# Altium PCB PULSECAPS.PcbDoc
Units mm, origin at the board's own origin, x right, y up, seen from the top; angles counter-clockwise.
Board outline 255 x 158 mm, 2 copper layers (Top Layer, Bottom Layer), stack 1.571 mm thick; 90 components, 32 nets, 198 pads, 0 vias.
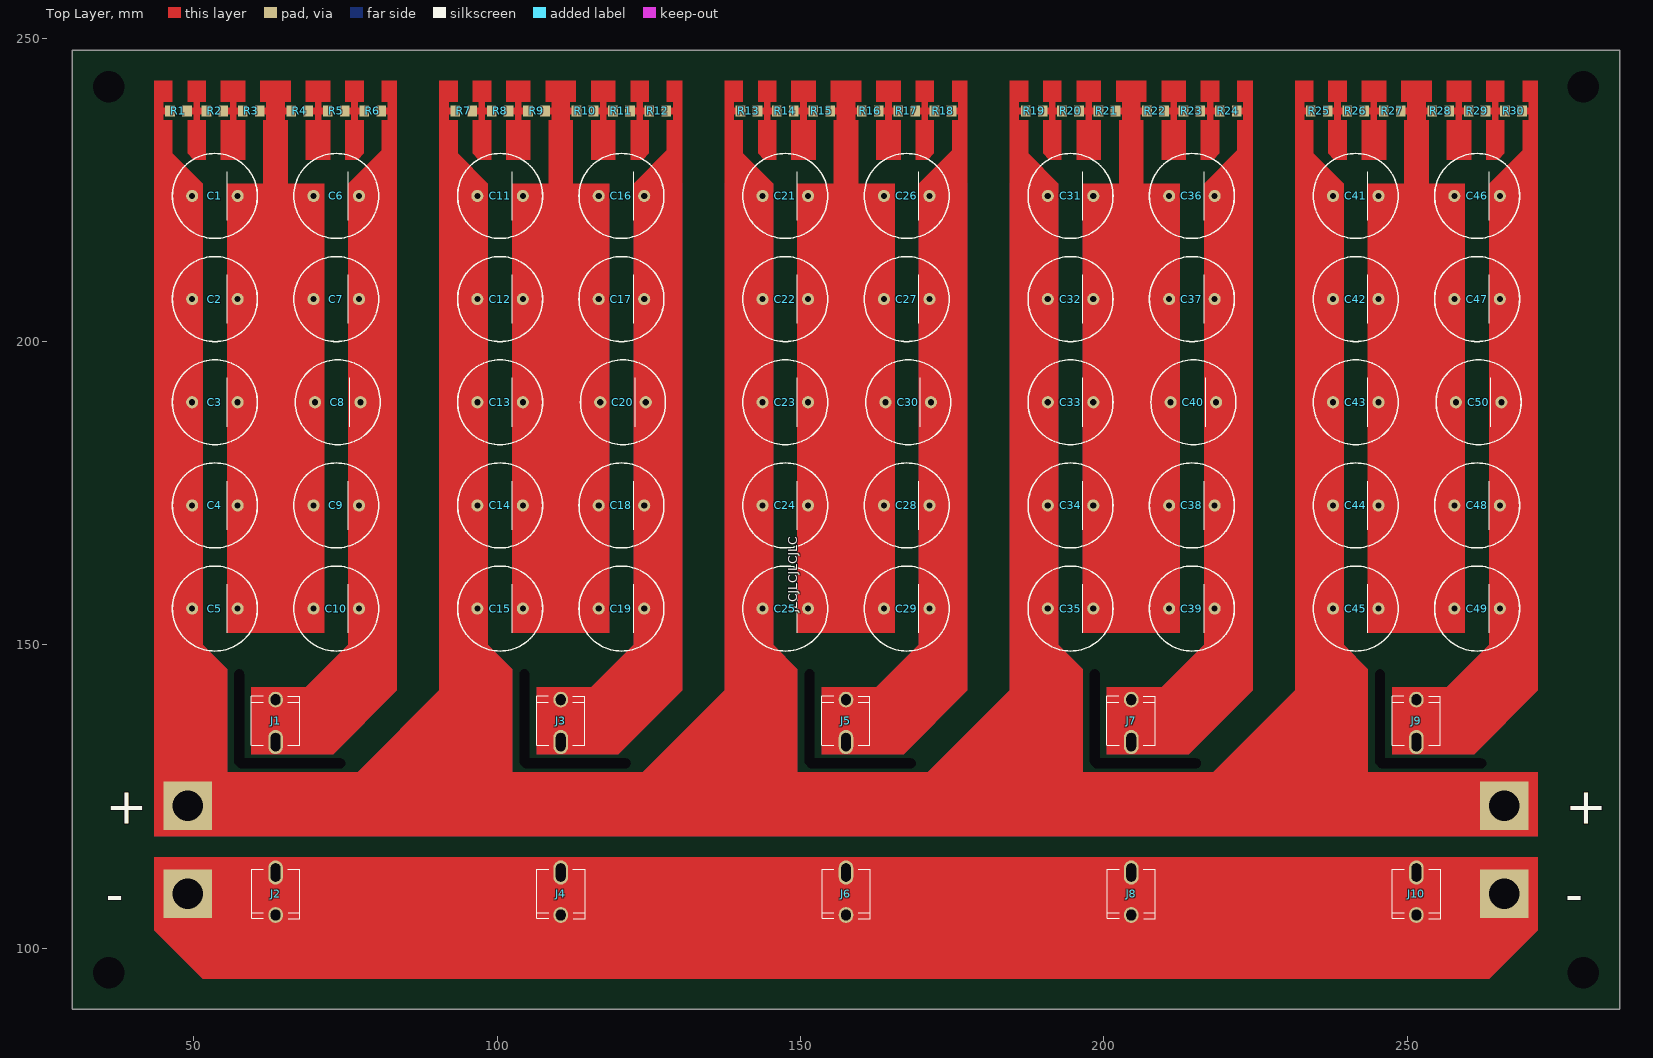
[diagram p0: Top Layer view]
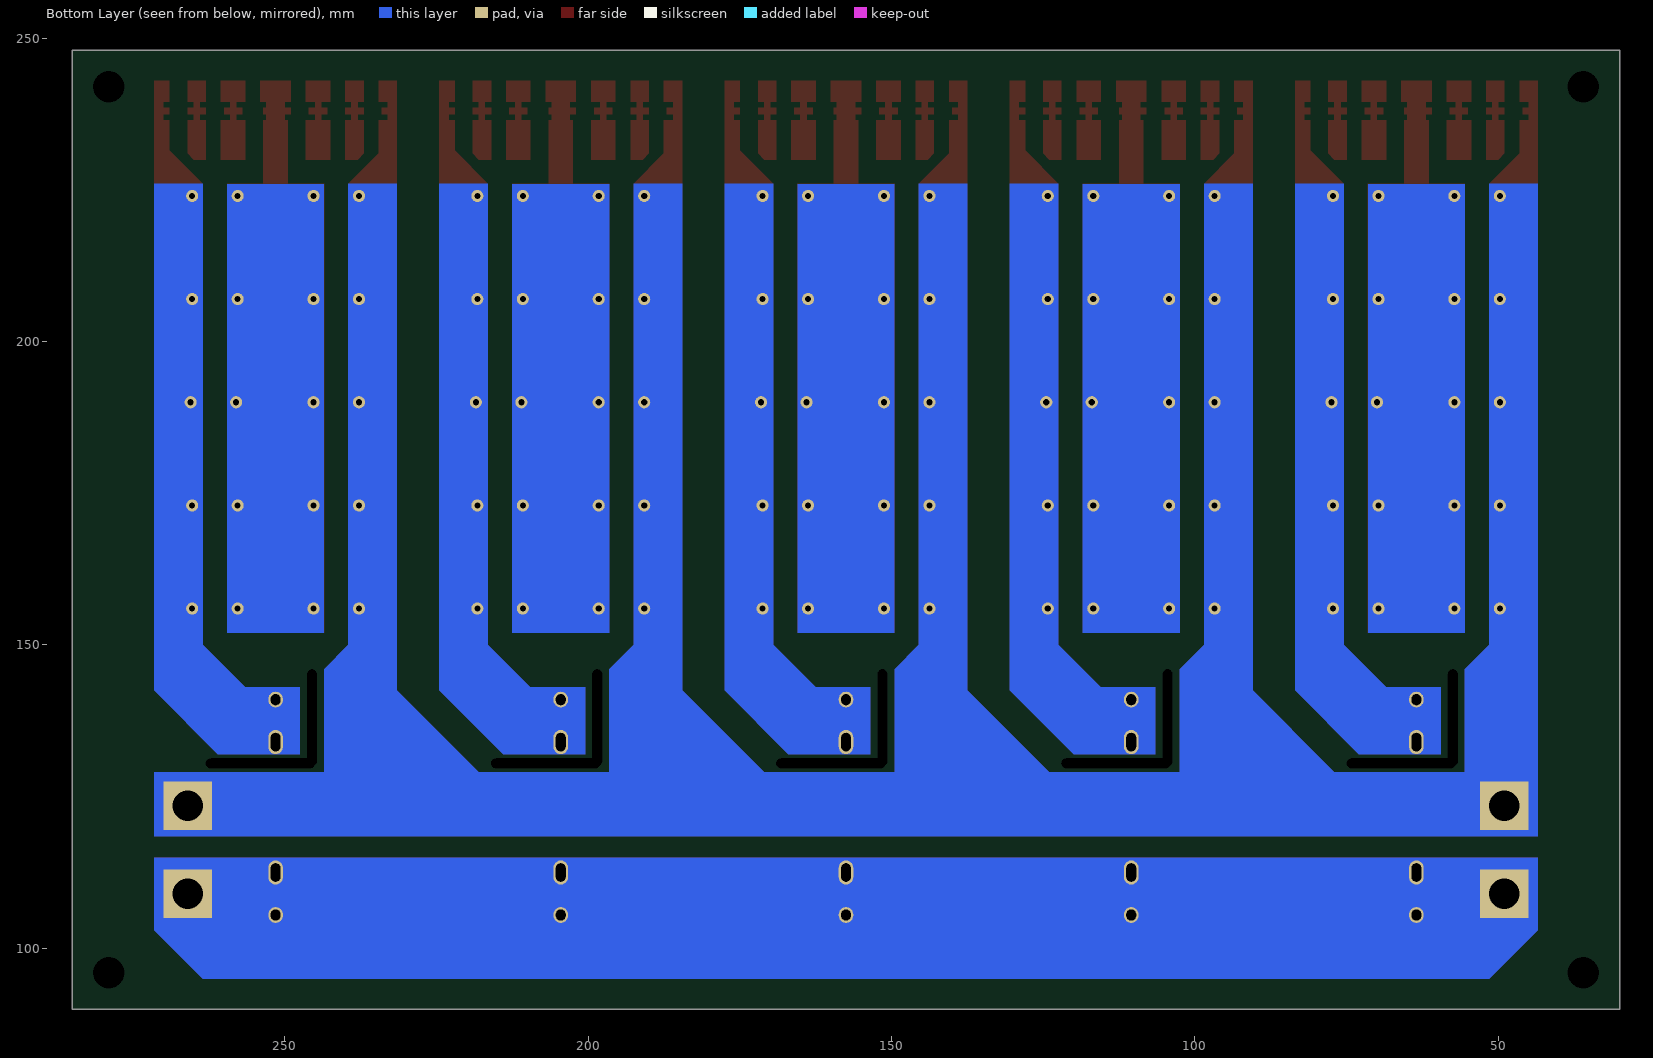
[diagram p1: Bottom Layer view, seen from below]

## Layer stack, top to bottom
Top Solder: solder mask 0.0102, Solder Resist, Dk 3.5
Top Layer: signal copper 0.0356
Dielectric 1: dielectric 1.5, FR-4, Dk 4.8
Bottom Layer: signal copper 0.0356
Bottom Solder: solder mask 0.0102, Solder Resist, Dk 3.5

## Board outline
30,90 285,90 285,248 30,248

## Design rules (kind name [scope] priority, off if disabled: settings)
Clearance [All] p1: gap=0.254 ignorepadtopadclearanceinfootprint=FALSE except(0: Arc-Hole Track-Hole SMDPad-Hole THPad-Hole Via-Hole Fill-Hole Poly-Hole Region-Hole Text-Hole)
PolygonConnect [All] p1: connectstyle=Relief reliefconductorwidth=0.254 reliefentries=4 polygonreliefangle="90 Angle" airgapwidth=0.254
RoutingVias [All] p1: holewidth=0.711 width=1.27 viastyle="Through Hole" minholewidth=0.711 minwidth=1.27 maxholewidth=0.711 maxwidth=1.27
SolderMaskExpansion [All] p1: expansion=0.102
Width [All] p1: maxlimit=0.254 minlimit=0.254 preferedwidth=0.254
30 further rules are at their usual default settings.

## Components (designator, comment, footprint, x,y, rotation, side; value= is the part's Value field where it differs from the comment)
C1 "400BXW100MEFR16X30" C_CAN_TH_7.5MM_LEADS 53.5,224 r180 top value=100uF
C2 "400BXW100MEFR16X30" C_CAN_TH_7.5MM_LEADS 53.5,207 r180 top value=100uF
C3 "400BXW100MEFR16X30" C_CAN_TH_7.5MM_LEADS 53.5,190 r180 top value=100uF
C4 "400BXW100MEFR16X30" C_CAN_TH_7.5MM_LEADS 53.5,173 r180 top value=100uF
C5 "400BXW100MEFR16X30" C_CAN_TH_7.5MM_LEADS 53.5,156 r180 top value=100uF
C6 "400BXW100MEFR16X30" C_CAN_TH_7.5MM_LEADS 73.5,224 r180 top value=100uF
C7 "400BXW100MEFR16X30" C_CAN_TH_7.5MM_LEADS 73.5,207 r180 top value=100uF
C8 "400BXW100MEFR16X30" C_CAN_TH_7.5MM_LEADS 73.75,190 r180 top value=100uF
C9 "400BXW100MEFR16X30" C_CAN_TH_7.5MM_LEADS 73.5,173 r180 top value=100uF
C10 "400BXW100MEFR16X30" C_CAN_TH_7.5MM_LEADS 73.5,156 r180 top value=100uF
C11 "400BXW100MEFR16X30" C_CAN_TH_7.5MM_LEADS 100.5,224 r180 top value=100uF
C12 "400BXW100MEFR16X30" C_CAN_TH_7.5MM_LEADS 100.5,207 r180 top value=100uF
C13 "400BXW100MEFR16X30" C_CAN_TH_7.5MM_LEADS 100.5,190 r180 top value=100uF
C14 "400BXW100MEFR16X30" C_CAN_TH_7.5MM_LEADS 100.5,173 r180 top value=100uF
C15 "400BXW100MEFR16X30" C_CAN_TH_7.5MM_LEADS 100.5,156 r180 top value=100uF
C16 "400BXW100MEFR16X30" C_CAN_TH_7.5MM_LEADS 120.5,224 r180 top value=100uF
C17 "400BXW100MEFR16X30" C_CAN_TH_7.5MM_LEADS 120.5,207 r180 top value=100uF
C18 "400BXW100MEFR16X30" C_CAN_TH_7.5MM_LEADS 120.5,173 r180 top value=100uF
C19 "400BXW100MEFR16X30" C_CAN_TH_7.5MM_LEADS 120.5,156 r180 top value=100uF
C20 "400BXW100MEFR16X30" C_CAN_TH_7.5MM_LEADS 120.75,190 r180 top value=100uF
C21 "400BXW100MEFR16X30" C_CAN_TH_7.5MM_LEADS 147.5,224 r180 top value=100uF
C22 "400BXW100MEFR16X30" C_CAN_TH_7.5MM_LEADS 147.5,207 r180 top value=100uF
C23 "400BXW100MEFR16X30" C_CAN_TH_7.5MM_LEADS 147.5,190 r180 top value=100uF
C24 "400BXW100MEFR16X30" C_CAN_TH_7.5MM_LEADS 147.5,173 r180 top value=100uF
C25 "400BXW100MEFR16X30" C_CAN_TH_7.5MM_LEADS 147.5,156 r180 top value=100uF
C26 "400BXW100MEFR16X30" C_CAN_TH_7.5MM_LEADS 167.5,224 r180 top value=100uF
C27 "400BXW100MEFR16X30" C_CAN_TH_7.5MM_LEADS 167.5,207 r180 top value=100uF
C28 "400BXW100MEFR16X30" C_CAN_TH_7.5MM_LEADS 167.5,173 r180 top value=100uF
C29 "400BXW100MEFR16X30" C_CAN_TH_7.5MM_LEADS 167.5,156 r180 top value=100uF
C30 "400BXW100MEFR16X30" C_CAN_TH_7.5MM_LEADS 167.75,190 r180 top value=100uF
C31 "400BXW100MEFR16X30" C_CAN_TH_7.5MM_LEADS 194.5,224 r180 top value=100uF
C32 "400BXW100MEFR16X30" C_CAN_TH_7.5MM_LEADS 194.5,207 r180 top value=100uF
C33 "400BXW100MEFR16X30" C_CAN_TH_7.5MM_LEADS 194.5,190 r180 top value=100uF
C34 "400BXW100MEFR16X30" C_CAN_TH_7.5MM_LEADS 194.5,173 r180 top value=100uF
C35 "400BXW100MEFR16X30" C_CAN_TH_7.5MM_LEADS 194.5,156 r180 top value=100uF
C36 "400BXW100MEFR16X30" C_CAN_TH_7.5MM_LEADS 214.5,224 r180 top value=100uF
C37 "400BXW100MEFR16X30" C_CAN_TH_7.5MM_LEADS 214.5,207 r180 top value=100uF
C38 "400BXW100MEFR16X30" C_CAN_TH_7.5MM_LEADS 214.5,173 r180 top value=100uF
C39 "400BXW100MEFR16X30" C_CAN_TH_7.5MM_LEADS 214.5,156 r180 top value=100uF
C40 "400BXW100MEFR16X30" C_CAN_TH_7.5MM_LEADS 214.75,190 r180 top value=100uF
C41 "400BXW100MEFR16X30" C_CAN_TH_7.5MM_LEADS 241.5,224 r180 top value=100uF
C42 "400BXW100MEFR16X30" C_CAN_TH_7.5MM_LEADS 241.5,207 r180 top value=100uF
C43 "400BXW100MEFR16X30" C_CAN_TH_7.5MM_LEADS 241.5,190 r180 top value=100uF
C44 "400BXW100MEFR16X30" C_CAN_TH_7.5MM_LEADS 241.5,173 r180 top value=100uF
C45 "400BXW100MEFR16X30" C_CAN_TH_7.5MM_LEADS 241.5,156 r180 top value=100uF
C46 "400BXW100MEFR16X30" C_CAN_TH_7.5MM_LEADS 261.5,224 r180 top value=100uF
C47 "400BXW100MEFR16X30" C_CAN_TH_7.5MM_LEADS 261.5,207 r180 top value=100uF
C48 "400BXW100MEFR16X30" C_CAN_TH_7.5MM_LEADS 261.5,173 r180 top value=100uF
C49 "400BXW100MEFR16X30" C_CAN_TH_7.5MM_LEADS 261.5,156 r180 top value=100uF
C50 "400BXW100MEFR16X30" C_CAN_TH_7.5MM_LEADS 261.75,190 r180 top value=100uF
J1 "LS-601" LS-601 63.5,137.5 r270 top
J2 "LS-601" LS-601 63.5,109 r90 top
J3 "LS-601" LS-601 110.5,137.5 r270 top
J4 "LS-601" LS-601 110.5,109 r90 top
J5 "LS-601" LS-601 157.5,137.5 r270 top
J6 "LS-601" LS-601 157.5,109 r90 top
J7 "LS-601" LS-601 204.5,137.5 r270 top
J8 "LS-601" LS-601 204.5,109 r90 top
J9 "LS-601" LS-601 251.5,137.5 r270 top
J10 "LS-601" LS-601 251.5,109 r90 top
R1 "1206W4F1003T5E" R_1206 47.5,238 r180 top value=100k
R2 "1206W4F1003T5E" R_1206 53.5,238 r180 top value=100k
R3 "1206W4F1003T5E" R_1206 59.5,238 r180 top value=100k
R4 "1206W4F1003T5E" R_1206 67.5,238 r180 top value=100k
R5 "1206W4F1003T5E" R_1206 73.5,238 r180 top value=100k
R6 "1206W4F1003T5E" R_1206 79.5,238 r180 top value=100k
R7 "1206W4F1003T5E" R_1206 94.5,238 r180 top value=100k
R8 "1206W4F1003T5E" R_1206 100.5,238 r180 top value=100k
R9 "1206W4F1003T5E" R_1206 106.5,238 r180 top value=100k
R10 "1206W4F1003T5E" R_1206 114.5,238 r180 top value=100k
R11 "1206W4F1003T5E" R_1206 120.5,238 r180 top value=100k
R12 "1206W4F1003T5E" R_1206 126.5,238 r180 top value=100k
R13 "1206W4F1003T5E" R_1206 141.5,238 r180 top value=100k
R14 "1206W4F1003T5E" R_1206 147.5,238 r180 top value=100k
R15 "1206W4F1003T5E" R_1206 153.5,238 r180 top value=100k
R16 "1206W4F1003T5E" R_1206 161.5,238 r180 top value=100k
R17 "1206W4F1003T5E" R_1206 167.5,238 r180 top value=100k
R18 "1206W4F1003T5E" R_1206 173.5,238 r180 top value=100k
R19 "1206W4F1003T5E" R_1206 188.5,238 r180 top value=100k
R20 "1206W4F1003T5E" R_1206 194.5,238 r180 top value=100k
R21 "1206W4F1003T5E" R_1206 200.5,238 r180 top value=100k
R22 "1206W4F1003T5E" R_1206 208.5,238 r180 top value=100k
R23 "1206W4F1003T5E" R_1206 214.5,238 r180 top value=100k
R24 "1206W4F1003T5E" R_1206 220.5,238 r180 top value=100k
R25 "1206W4F1003T5E" R_1206 235.5,238 r180 top value=100k
R26 "1206W4F1003T5E" R_1206 241.5,238 r180 top value=100k
R27 "1206W4F1003T5E" R_1206 247.5,238 r180 top value=100k
R28 "1206W4F1003T5E" R_1206 255.5,238 r180 top value=100k
R29 "1206W4F1003T5E" R_1206 261.5,238 r180 top value=100k
R30 "1206W4F1003T5E" R_1206 267.5,238 r180 top value=100k

## Footprints (in the part's own frame and the unit in brackets; to place one, negate y for a bottom-side part, rotate by r counter-clockwise, add the part's x,y. Pads: shape width x height; smd on the part's side, far side on the other; paste and mask are expansions set on the pad)
C_CAN_TH_7.5MM_LEADS [mm]
  round 2 hole 1: 1(-3.75,0) 2(3.75,0)
  silkscreen extent -7,-7 7,7, body extent -8,-8 8,8, height 25.02
LS-601 [mm] "FUSE HOLDER"
  oval 2.6x2.4 hole 1.6 slot 1.8 at 0 deg: 1(-3.5,0)
  oval 4x2.4 hole 1.6 slot 3 at 0 deg: 1(3.5,0)
  silkscreen extent -4.1,-4 4.05,3.95, body extent -4.05,-3.95 4.05,3.95, height 10.89
R_1206 [mm] "Body 3.2 x 1.6 mm (LxW typ)"
  rect 1.6x1.8 smd: 1(-1.4,0) 2(1.4,0)
  body extent -1.91,-0.76 1.91,0.76, height 1

## Part data
C1 C2 C3 C4 C5 C6 C7 C8 C9 C10 C11 C12 C13 C14 C15 C16 C17 C18 C19 C20 C21 C22 C23 C24 C25 C26 C27 C28 C29 C30 C31 C32 C33 C34 C35 C36 C37 C38 C39 C40 C41 C42 C43 C44 C45 C46 C47 C48 C49 C50: "C - CAPACITOR - ELECTROLYTIC - 100uF - 400V", JLC Availability=Extended, LCSC Part #=C441621, ESR=40mOhm, WVDC=400
J1 J2 J3 J4 J5 J6 J7 J8 J9 J10: "J - JACK - FUSEHOLDER - 6X30 - THT", JLC Availability=Extended, LCSC Part #=C182321
R1 R2 R3 R4 R5 R6 R7 R8 R9 R10 R11 R12 R13 R14 R15 R16 R17 R18 R19 R20 R21 R22 R23 R24 R25 R26 R27 R28 R29 R30: "R - RESISTOR - SMD - 100k - 1% - 1206", JLC Availability=Basic, LCSC Part #=C17900

## Free pads (board coordinates)
  round 0 hole 1.6 slot 16 at 90 deg: 22(57.5,138) 22(104.5,138) 22(151.5,138) 22(198.5,138) 22(245.5,138)
  round 0 hole 1.6 slot 18 at 0 deg: 22(66,130.5) 22(113,130.5) 22(160,130.5) 22(207,130.5) 22(254,130.5)
  rect 0x0 hole 5.2 unplated: 23(36,96) 23(36,242) 23(279,96) 23(279,242)
  rect 8x8 hole 5: 23(49,123.5) 23(49,109) 23(266,109) 23(266,123.5)

## Nets (pads, with @x,y where several pads share a name; then routed paths per layer and width w, separated by ;. In a path a pad name is that pad's centre, name@x,y a point inside that pad or via, vN(x,y) a via of type N, cw(c..) or ccw(c..) an arc to the next point about the centre after c; other vN are vias at no path point)
B+: C1.2 C2.2 C3.2 C4.2 C5.2 C11.2 C12.2 C13.2 C14.2 C15.2 C21.2 C22.2 C23.2 C24.2 C25.2 C31.2 C32.2 C33.2 C34.2 C35.2 C41.2 C42.2 C43.2 C44.2 C45.2 pad.23@49,123.5 pad.23@266,123.5 R1.2 R7.2 R13.2 R19.2 R25.2
B-: J2.1 J4.1 J6.1 J8.1 J10.1 pad.23@49,109 pad.23@266,109
NetC1_1: C1.1 C2.1 C3.1 C4.1 C5.1 C6.2 C7.2 C8.2 C9.2 C10.2 R3.1 R4.2
NetC6_1: C6.1 C7.1 C8.1 C9.1 C10.1 J1.1 R6.1
NetC11_1: C11.1 C12.1 C13.1 C14.1 C15.1 C16.2 C17.2 C18.2 C19.2 C20.2 R9.1 R10.2
NetC16_1: C16.1 C17.1 C18.1 C19.1 C20.1 J3.1 R12.1
NetC21_1: C21.1 C22.1 C23.1 C24.1 C25.1 C26.2 C27.2 C28.2 C29.2 C30.2 R15.1 R16.2
NetC26_1: C26.1 C27.1 C28.1 C29.1 C30.1 J5.1 R18.1
NetC31_1: C31.1 C32.1 C33.1 C34.1 C35.1 C36.2 C37.2 C38.2 C39.2 C40.2 R21.1 R22.2
NetC36_1: C36.1 C37.1 C38.1 C39.1 C40.1 J7.1 R24.1
NetC41_1: C41.1 C42.1 C43.1 C44.1 C45.1 C46.2 C47.2 C48.2 C49.2 C50.2 R27.1 R28.2
NetC46_1: C46.1 C47.1 C48.1 C49.1 C50.1 J9.1 R30.1
NetR1_1: R1.1 R2.2
NetR2_1: R2.1 R3.2
NetR4_1: R4.1 R5.2
NetR5_1: R5.1 R6.2
NetR7_1: R7.1 R8.2
NetR8_1: R8.1 R9.2
NetR10_1: R10.1 R11.2
NetR11_1: R11.1 R12.2
NetR13_1: R13.1 R14.2
NetR14_1: R14.1 R15.2
NetR16_1: R16.1 R17.2
NetR17_1: R17.1 R18.2
NetR19_1: R19.1 R20.2
NetR20_1: R20.1 R21.2
NetR22_1: R22.1 R23.2
NetR23_1: R23.1 R24.2
NetR25_1: R25.1 R26.2
NetR26_1: R26.1 R27.2
NetR28_1: R28.1 R29.2
NetR29_1: R29.1 R30.2

## Other copper
Top Layer:
  region net B-: 271.5,105 271.5,103 263.5,95 51.5,95 43.5,103 43.5,105
  region net B-: 231.5,115 271.5,115 271.5,103 231.5,103
  region net B+: 232,118
  region net B+: 231.5,118.5 231.5,243 234.5,243 234.5,239.5 233,239.5 233,238.5 234,238.5 234,237.5 233,237.5 233,236.5 234.5,236.5 234.5,231 239.5,226 239.5,150 243.5,146 243.5,129 265,129 271.5,129 271.5,118.5
  region net NetC41_1: 243.5,152 259.5,152 259.5,226 253.5,226 253.5,236.5 253,236.5 253,237.5 253.5,237.5 253.5,238.5 253,238.5 253,239.5 254,239.5 254,243 249,243 249,239.5 250,239.5 250,238.5 249,238.5 249,237.5 250,237.5 250,236.5 249.5,236.5 249.5,226 243.5,226
  region net NetR26_1: 242.5,243 246.5,243 246.5,239.5 245,239.5 245,238.5 246,238.5 246,237.5 245,237.5 245,236.5 246.5,236.5 246.5,230 242.5,230 242.5,236.5 244,236.5 244,237.5 243,237.5 243,238.5 244,238.5 244,239.5 242.5,239.5
  region net NetR28_1: 256.5,243 260.5,243 260.5,239.5 259,239.5 259,238.5 260,238.5 260,237.5 259,237.5 259,236.5 260.5,236.5 260.5,230 256.5,230 256.5,236.5 258,236.5 258,237.5 257,237.5 257,238.5 258,238.5 258,239.5 256.5,239.5
  region net NetR25_1: 240,230 240,236.5 239,236.5 239,237.5 240,237.5 240,238.5 239,238.5 239,239.5 240,239.5 240,243 237,243 237,239.5 238,239.5 238,238.5 237,238.5 237,237.5 238,237.5 238,236.5 237,236.5 237,231 238,230
  region net NetR29_1: 263,230 263,236.5 264,236.5 264,237.5 263,237.5 263,238.5 264,238.5 264,239.5 263,239.5 263,243 266,243 266,239.5 265,239.5 265,238.5 266,238.5 266,237.5 265,237.5 265,236.5 266,236.5 266,231 265,230
  region net NetC46_1: 263.5,226 269,231.5 269,236.5 270,236.5 270,237.5 269,237.5 269,238.5 270,238.5 270,239.5 269,239.5 269,243 271.5,243 271.5,142.5 261,132 247.5,132 247.5,143 256.5,143 263.5,150
  region net B-: 184.5,115 232,115 232,103 184.5,103
  region net B+: 185,118
  region net B+: 184.5,118.5 184.5,243 187.5,243 187.5,239.5 186,239.5 186,238.5 187,238.5 187,237.5 186,237.5 186,236.5 187.5,236.5 187.5,231 192.5,226 192.5,150 196.5,146 196.5,129 218,129 232,143 232,118.5
  region net NetC31_1: 196.5,152 212.5,152 212.5,226 206.5,226 206.5,236.5 206,236.5 206,237.5 206.5,237.5 206.5,238.5 206,238.5 206,239.5 207,239.5 207,243 202,243 202,239.5 203,239.5 203,238.5 202,238.5 202,237.5 203,237.5 203,236.5 202.5,236.5 202.5,226 196.5,226
  region net NetR20_1: 195.5,243 199.5,243 199.5,239.5 198,239.5 198,238.5 199,238.5 199,237.5 198,237.5 198,236.5 199.5,236.5 199.5,230 195.5,230 195.5,236.5 197,236.5 197,237.5 196,237.5 196,238.5 197,238.5 197,239.5 195.5,239.5
  region net NetR22_1: 209.5,243 213.5,243 213.5,239.5 212,239.5 212,238.5 213,238.5 213,237.5 212,237.5 212,236.5 213.5,236.5 213.5,230 209.5,230 209.5,236.5 211,236.5 211,237.5 210,237.5 210,238.5 211,238.5 211,239.5 209.5,239.5
  region net NetR19_1: 193,230 193,236.5 192,236.5 192,237.5 193,237.5 193,238.5 192,238.5 192,239.5 193,239.5 193,243 190,243 190,239.5 191,239.5 191,238.5 190,238.5 190,237.5 191,237.5 191,236.5 190,236.5 190,231 191,230
  region net NetR23_1: 216,230 216,236.5 217,236.5 217,237.5 216,237.5 216,238.5 217,238.5 217,239.5 216,239.5 216,243 219,243 219,239.5 218,239.5 218,238.5 219,238.5 219,237.5 218,237.5 218,236.5 219,236.5 219,231 218,230
  region net NetC36_1: 216.5,226 222,231.5 222,236.5 223,236.5 223,237.5 222,237.5 222,238.5 223,238.5 223,239.5 222,239.5 222,243 224.5,243 224.5,142.5 214,132 200.5,132 200.5,143 209.5,143 216.5,150
  region net B-: 137.5,115 185,115 185,103 137.5,103
  region net B+: 138,118
  region net B+: 137.5,118.5 137.5,243 140.5,243 140.5,239.5 139,239.5 139,238.5 140,238.5 140,237.5 139,237.5 139,236.5 140.5,236.5 140.5,231 145.5,226 145.5,150 149.5,146 149.5,129 171,129 185,143 185,118.5
  region net NetC21_1: 149.5,152 165.5,152 165.5,226 159.5,226 159.5,236.5 159,236.5 159,237.5 159.5,237.5 159.5,238.5 159,238.5 159,239.5 160,239.5 160,243 155,243 155,239.5 156,239.5 156,238.5 155,238.5 155,237.5 156,237.5 156,236.5 155.5,236.5 155.5,226 149.5,226
  region net NetR14_1: 148.5,243 152.5,243 152.5,239.5 151,239.5 151,238.5 152,238.5 152,237.5 151,237.5 151,236.5 152.5,236.5 152.5,230 148.5,230 148.5,236.5 150,236.5 150,237.5 149,237.5 149,238.5 150,238.5 150,239.5 148.5,239.5
  region net NetR16_1: 162.5,243 166.5,243 166.5,239.5 165,239.5 165,238.5 166,238.5 166,237.5 165,237.5 165,236.5 166.5,236.5 166.5,230 162.5,230 162.5,236.5 164,236.5 164,237.5 163,237.5 163,238.5 164,238.5 164,239.5 162.5,239.5
  region net NetR13_1: 146,230 146,236.5 145,236.5 145,237.5 146,237.5 146,238.5 145,238.5 145,239.5 146,239.5 146,243 143,243 143,239.5 144,239.5 144,238.5 143,238.5 143,237.5 144,237.5 144,236.5 143,236.5 143,231 144,230
  region net NetR17_1: 169,230 169,236.5 170,236.5 170,237.5 169,237.5 169,238.5 170,238.5 170,239.5 169,239.5 169,243 172,243 172,239.5 171,239.5 171,238.5 172,238.5 172,237.5 171,237.5 171,236.5 172,236.5 172,231 171,230
  region net NetC26_1: 169.5,226 175,231.5 175,236.5 176,236.5 176,237.5 175,237.5 175,238.5 176,238.5 176,239.5 175,239.5 175,243 177.5,243 177.5,142.5 167,132 153.5,132 153.5,143 162.5,143 169.5,150
  region net B-: 90.5,115 138,115 138,103 90.5,103
  region net B+: 91,118
  region net B+: 90.5,118.5 90.5,243 93.5,243 93.5,239.5 92,239.5 92,238.5 93,238.5 93,237.5 92,237.5 92,236.5 93.5,236.5 93.5,231 98.5,226 98.5,150 102.5,146 102.5,129 124,129 138,143 138,118.5
  region net NetC11_1: 102.5,152 118.5,152 118.5,226 112.5,226 112.5,236.5 112,236.5 112,237.5 112.5,237.5 112.5,238.5 112,238.5 112,239.5 113,239.5 113,243 108,243 108,239.5 109,239.5 109,238.5 108,238.5 108,237.5 109,237.5 109,236.5 108.5,236.5 108.5,226 102.5,226
  region net NetR8_1: 101.5,243 105.5,243 105.5,239.5 104,239.5 104,238.5 105,238.5 105,237.5 104,237.5 104,236.5 105.5,236.5 105.5,230 101.5,230 101.5,236.5 103,236.5 103,237.5 102,237.5 102,238.5 103,238.5 103,239.5 101.5,239.5
  region net NetR10_1: 115.5,243 119.5,243 119.5,239.5 118,239.5 118,238.5 119,238.5 119,237.5 118,237.5 118,236.5 119.5,236.5 119.5,230 115.5,230 115.5,236.5 117,236.5 117,237.5 116,237.5 116,238.5 117,238.5 117,239.5 115.5,239.5
  region net NetR7_1: 99,230 99,236.5 98,236.5 98,237.5 99,237.5 99,238.5 98,238.5 98,239.5 99,239.5 99,243 96,243 96,239.5 97,239.5 97,238.5 96,238.5 96,237.5 97,237.5 97,236.5 96,236.5 96,231 97,230
  region net NetR11_1: 122,230 122,236.5 123,236.5 123,237.5 122,237.5 122,238.5 123,238.5 123,239.5 122,239.5 122,243 125,243 125,239.5 124,239.5 124,238.5 125,238.5 125,237.5 124,237.5 124,236.5 125,236.5 125,231 124,230
  region net NetC16_1: 122.5,226 128,231.5 128,236.5 129,236.5 129,237.5 128,237.5 128,238.5 129,238.5 129,239.5 128,239.5 128,243 130.5,243 130.5,142.5 120,132 106.5,132 106.5,143 115.5,143 122.5,150
  region net NetC6_1: 75.5,226 81,231.5 81,236.5 82,236.5 82,237.5 81,237.5 81,238.5 82,238.5 82,239.5 81,239.5 81,243 83.5,243 83.5,142.5 73,132 59.5,132 59.5,143 68.5,143 75.5,150
  region net NetR5_1: 75,230 75,236.5 76,236.5 76,237.5 75,237.5 75,238.5 76,238.5 76,239.5 75,239.5 75,243 78,243 78,239.5 77,239.5 77,238.5 78,238.5 78,237.5 77,237.5 77,236.5 78,236.5 78,231 77,230
  region net NetR1_1: 52,230 52,236.5 51,236.5 51,237.5 52,237.5 52,238.5 51,238.5 51,239.5 52,239.5 52,243 49,243 49,239.5 50,239.5 50,238.5 49,238.5 49,237.5 50,237.5 50,236.5 49,236.5 49,231 50,230
  region net NetR4_1: 68.5,243 72.5,243 72.5,239.5 71,239.5 71,238.5 72,238.5 72,237.5 71,237.5 71,236.5 72.5,236.5 72.5,230 68.5,230 68.5,236.5 70,236.5 70,237.5 69,237.5 69,238.5 70,238.5 70,239.5 68.5,239.5
  region net NetR2_1: 54.5,243 58.5,243 58.5,239.5 57,239.5 57,238.5 58,238.5 58,237.5 57,237.5 57,236.5 58.5,236.5 58.5,230 54.5,230 54.5,236.5 56,236.5 56,237.5 55,237.5 55,238.5 56,238.5 56,239.5 54.5,239.5
  region net NetC1_1: 55.5,152 71.5,152 71.5,226 65.5,226 65.5,236.5 65,236.5 65,237.5 65.5,237.5 65.5,238.5 65,238.5 65,239.5 66,239.5 66,243 61,243 61,239.5 62,239.5 62,238.5 61,238.5 61,237.5 62,237.5 62,236.5 61.5,236.5 61.5,226 55.5,226
  region net B+: 43.5,118.5 43.5,243 46.5,243 46.5,239.5 45,239.5 45,238.5 46,238.5 46,237.5 45,237.5 45,236.5 46.5,236.5 46.5,231 51.5,226 51.5,150 55.5,146 55.5,129 77,129 91,143 91,118.5
  region: 44,118
  region net B-: 43.5,115 91,115 91,103 43.5,103
Bottom Layer:
  rectangle net NetC41_1: 243.5,152 259.5,226
  rectangle net B-: 231.5,103 271.5,115
  rectangle net NetC31_1: 196.5,152 212.5,226
  rectangle net B-: 184.5,103 232,115
  rectangle net NetC21_1: 149.5,152 165.5,226
  rectangle net B-: 137.5,103 185,115
  rectangle net NetC11_1: 102.5,152 118.5,226
  rectangle net B-: 90.5,103 138,115
  rectangle net B-: 43.5,103 91,115
  rectangle net NetC1_1: 55.5,152 71.5,226
  region net B-: 271.5,105 271.5,103 263.5,95 51.5,95 43.5,103 43.5,105
  region net NetC46_1: 247.5,132 247.5,143 256.5,143 263.5,150 263.5,226 271.5,226 271.5,142.5 261,132
  region net B+: 271.5,118.5 271.5,129 265,129 243.5,129 243.5,146 239.5,150 239.5,226 231.5,226 231.5,118.5
  region net NetC36_1: 200.5,132 200.5,143 209.5,143 216.5,150 216.5,226 224.5,226 224.5,142.5 214,132
  region net B+: 232,118.5 232,143 218,129 196.5,129 196.5,146 192.5,150 192.5,226 184.5,226 184.5,118.5
  region net NetC26_1: 153.5,132 153.5,143 162.5,143 169.5,150 169.5,226 177.5,226 177.5,142.5 167,132
  region net B+: 185,118.5 185,143 171,129 149.5,129 149.5,146 145.5,150 145.5,226 137.5,226 137.5,118.5
  region net NetC16_1: 106.5,132 106.5,143 115.5,143 122.5,150 122.5,226 130.5,226 130.5,142.5 120,132
  region net B+: 138,118.5 138,143 124,129 102.5,129 102.5,146 98.5,150 98.5,226 90.5,226 90.5,118.5
  region net B+: 91,118.5 91,143 77,129 55.5,129 55.5,146 51.5,150 51.5,226 43.5,226 43.5,118.5
  region net NetC6_1: 59.5,132 59.5,143 68.5,143 75.5,150 75.5,226 83.5,226 83.5,142.5 73,132

## Silkscreen, mask and mechanical layers (free items; w line width, h text height)
Top Overlay:
  text "JLCJLCJLCJLC" at 149.5,155.3 h1.52 r90
  text "+" at 35.5,120.5 h6
  text "+" at 276,120.5 h6
  text "-" at 35.5,106 h6
  text "-" at 276,106 h6
Board Outline:
  the board outline again, w0.1